# Altium PCB H202.PcbDoc (part 3 of 4)
Units mm, origin at the board's own origin, x right, y up, seen from the top; angles counter-clockwise.
Board outline 35.5 x 51.5 mm, 2 copper layers (Top Layer, Bottom Layer); 187 components, 179 nets, 669 pads, 25 vias.
Unrouted connection lines stored in the file: 414.
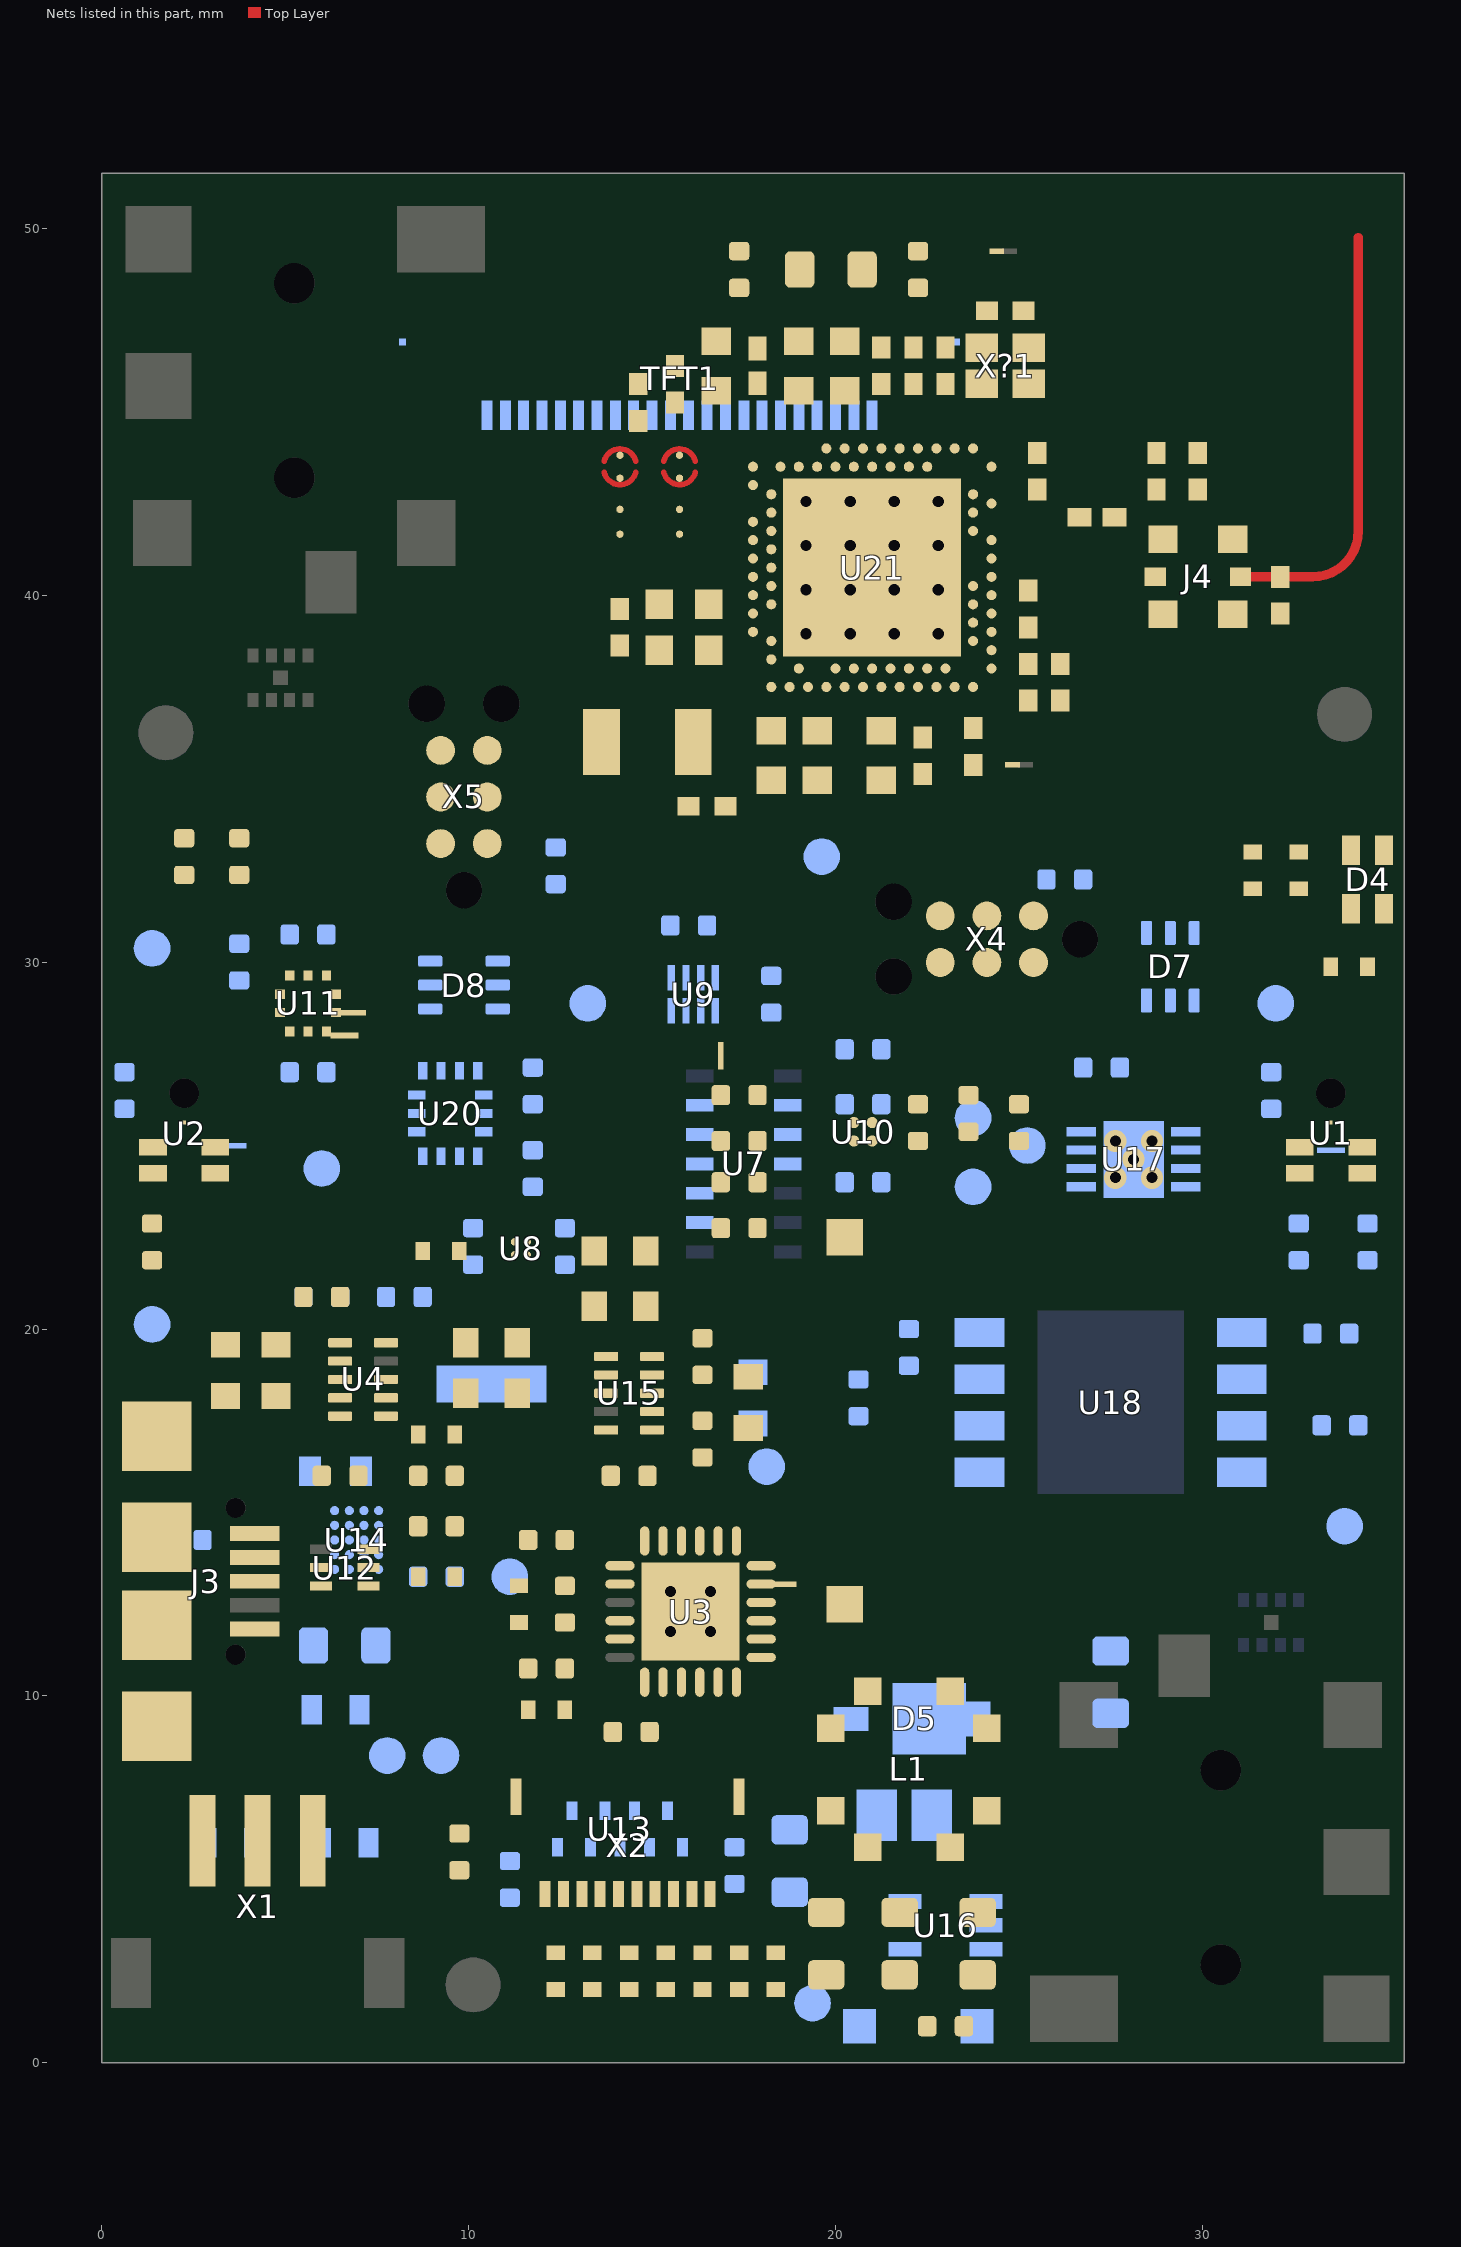
[diagram p2: the nets of this part, all layers, seen from the top]

## Part data (continued)
R5 R20: "910 kOhms ±1% 0.063W, 1/16W Chip Resistor 0402 (1005 Metric) Moisture Resistant Thick Film", Case Code (Imperial)=0402, Case Code (Metric)=1005, Manufacturer=Yageo, Manufacturer Part Number=RC0402FR-07910KL, Max Operating Temperature=155°C, Max Power Dissipation=63mW, Min Operating Temperature=-55°C, Power Rating=62.5mW, Resistance=910kR, Supplier Part Number 1=YAG3257CT-ND, Temperature Coefficient=100ppm/°C, Tolerance=1%, Voltage Rating=50V, Case/Package=0402, ComponentLink1Description=http://www.yageo.com/documents/recent/PYu-RC0402_51_RoHS_L_6.pdf?src-supplier=Avnet+Europe, ComponentLink1URL=http://www.yageo.com/documents/recent/PYu-RC0402_51_RoHS_L_6.pdf?src-supplier=Avnet+Europe, ComponentLink2Description=https://www.verical.com/server-webapp/html/getDatasheet?partID=741075&src-supplier=Verical, ComponentLink2URL=https://www.verical.com/server-webapp/html/getDatasheet?partID=741075&src-supplier=Verical, ComponentLink3Description=http://www.yageo.com/documents/recent/PYu-RC0402_51_RoHS_L_6.pdf?src-supplier=Avnet, ComponentLink3URL=http://www.yageo.com/documents/recent/PYu-RC0402_51_RoHS_L_6.pdf?src-supplier=Avnet, Composition="Thick Film", Contact Plating=Tin,Matte, Depth=0.5mm, Features="Moisture Resistant", Height=0.016inch, Lead Free="Lead Free", Length=1mm, Military Standard=Not, Number of Terminations=2, Packaging="Tape and Reel", Pricing 1="1=0.1, 10=0.015, 100=0.0062, 1000=0.0028, 2500=0.0024, 5000=0.002 (USD)", REACH SVHC=Unknown, Stock 1=96210, Supplier 1=Digi-Key, Termination=SMD/SMT, Voltage Rating (DC)=50V, Width=0.5mm
R6 R21: "390 kOhms ±1% 0.063W, 1/16W Chip Resistor 0402 (1005 Metric) Moisture Resistant Thick Film", Case Code (Imperial)=0402, Case Code (Metric)=1005, Manufacturer=Yageo, Manufacturer Part Number=RC0402FR-07390KL, Max Operating Temperature=155°C, Max Power Dissipation=63mW, Min Operating Temperature=-55°C, Power Rating=62.5mW, Resistance=390kR, Supplier Part Number 1=YAG3143CT-ND, Temperature Coefficient=100ppm/°C, Tolerance=1%, Voltage Rating=50V, Case/Package=0402, ComponentLink1Description=http://www.yageo.com/documents/recent/PYu-RC0402_51_RoHS_L_6.pdf?src-supplier=Future+Electronics, ComponentLink1URL=http://www.yageo.com/documents/recent/PYu-RC0402_51_RoHS_L_6.pdf?src-supplier=Future+Electronics, ComponentLink2Description=http://www.farnell.com/datasheets/2167052.pdf?src-supplier=Element14, ComponentLink2URL=http://www.farnell.com/datasheets/2167052.pdf?src-supplier=Element14, ComponentLink3Description=http://www.mouser.com/ds/2/447/PYu-RC0402_51_RoHS_L_6_r-8721.pdf?src-supplier=Mouser, ComponentLink3URL=http://www.mouser.com/ds/2/447/PYu-RC0402_51_RoHS_L_6_r-8721.pdf?src-supplier=Mouser, Composition="Thick Film", Depth=0.5mm, Features="Moisture Resistant", Height=0.016inch, Lead Free="Lead Free", Length=1mm, Military Standard=Not, Number of Terminations=2, Packaging="Tape and Reel", Pricing 1="1=0.1, 10=0.016, 100=0.0064, 1000=0.0029, 2500=0.0025, 5000=0.0021 (USD)", REACH SVHC=Unknown, Stock 1=118017, Supplier 1=Digi-Key, Termination=SMD/SMT, Weight=2.3E-05oz, Width=0.02inch
R7 R22: "88.7 kOhms ±1% 0.063W, 1/16W Chip Resistor 0402 (1005 Metric) Moisture Resistant Thick Film", Case Code (Imperial)=0402, Case Code (Metric)=1005, Manufacturer=Yageo, Manufacturer Part Number=RC0402FR-0788K7L, Max Operating Temperature=155°C, Min Operating Temperature=-55°C, Power Rating=62.5mW, Resistance=88.7kR, Supplier Part Number 1=311-88.7KLRCT-ND, Temperature Coefficient=100ppm/°C, Tolerance=1%, Voltage Rating=50V, Case/Package=0402, ComponentLink1Description=http://www.yageo.com/documents/recent/PYu-RC0402_51_RoHS_L_6.pdf?src-supplier=Avnet+Europe, ComponentLink1URL=http://www.yageo.com/documents/recent/PYu-RC0402_51_RoHS_L_6.pdf?src-supplier=Avnet+Europe, ComponentLink2Description=http://www.yageo.com/documents/recent/PYu-RC0402_51_RoHS_L_6_r.pdf?src-supplier=Future+Electronics, ComponentLink2URL=http://www.yageo.com/documents/recent/PYu-RC0402_51_RoHS_L_6_r.pdf?src-supplier=Future+Electronics, ComponentLink3Description=http://www.yageo.com/documents/recent/PYu-RC0402_51_RoHS_L_6.pdf?src-supplier=Avnet, ComponentLink3URL=http://www.yageo.com/documents/recent/PYu-RC0402_51_RoHS_L_6.pdf?src-supplier=Avnet, Composition="Thick Film", Contact Plating=Tin,Matte, Depth=0.5mm, Height=0.35mm, Lead Free="Lead Free", Length=1mm, Military Standard=Not, Packaging="Tape and Reel", Pricing 1="1=0.1, 10=0.016, 100=0.0064, 1000=0.0029, 2500=0.0025, 5000=0.0021 (USD)", Stock 1=136150, Supplier 1=Digi-Key, Termination=SMD/SMT, Voltage Rating (DC)=50V, Width=0.5mm
R8 R9 R17: "2.7 kOhms ±1% 0.063W, 1/16W Chip Resistor 0402 (1005 Metric) Moisture Resistant Thick Film", Case Code (Imperial)=0402, Case Code (Metric)=1005, Manufacturer=Yageo, Manufacturer Part Number=RC0402FR-072K7L, Max Operating Temperature=155°C, Max Power Dissipation=63mW, Min Operating Temperature=-55°C, Package Quantity=1, Resistance=2.7kR, Supplier Part Number 1=311-2.70KLRCT-ND, Temperature Coefficient=100ppm/°C, Tolerance=1%, Voltage Rating=50V, Case/Package=0402, ComponentLink1Description=http://www.mouser.com/ds/2/447/PYu-RC0402_51_RoHS_L_6_r-8721.pdf?src-supplier=Mouser, ComponentLink1URL=http://www.mouser.com/ds/2/447/PYu-RC0402_51_RoHS_L_6_r-8721.pdf?src-supplier=Mouser, ComponentLink2Description=http://www.yageo.com/documents/recent/PYu-RC_Group_51_RoHS_L_9.pdf?src-supplier=Digi-Key, ComponentLink2URL=http://www.yageo.com/documents/recent/PYu-RC_Group_51_RoHS_L_9.pdf?src-supplier=Digi-Key, ComponentLink3Description=http://www.yageo.com/documents/recent/PYu-RC_Group_51_RoHS_L_10.pdf?src-supplier=Digi-Key, ComponentLink3URL=http://www.yageo.com/documents/recent/PYu-RC_Group_51_RoHS_L_10.pdf?src-supplier=Digi-Key, ComponentLink4Description=http://www.farnell.com/datasheets/2167052.pdf?src-supplier=Element14, ComponentLink4URL=http://www.farnell.com/datasheets/2167052.pdf?src-supplier=Element14, Composition="Thick Film", Depth=0.5mm, Features="Moisture Resistant", Height=0.016inch, Lead Free="Lead Free", Length=1mm, Military Standard=Not, Number of Terminations=2, Packaging="Tape and Reel", Power Rating=63mW, Pricing 1="1=0.1, 10=0.016, 100=0.0064, 1000=0.0029, 2500=0.0025, 5000=0.0021 (USD)", REACH SVHC=Unknown, Stock 1=261850, Supplier 1=Digi-Key, Termination=SMD/SMT, Width=0.02inch, Working Voltage=50V
  R8 R9: ClassName=U_ESP32-WROOM32D_Module
R10 R11 R29 R30 R31: "10 kOhms ±1% 0.063W, 1/16W Chip Resistor 0402 (1005 Metric) Moisture Resistant Thick Film", Case Code (Imperial)=0402, Case Code (Metric)=1005, Manufacturer=Yageo, Manufacturer Part Number=RC0402FR-0710KP, Max Operating Temperature=155°C, Max Power Dissipation=63mW, Min Operating Temperature=-55°C, Resistance=10kR, Supplier Part Number 1=YAG1249CT-ND, Temperature Coefficient=150ppm/°C, Tolerance=1%, Case/Package=0402, ComponentLink1Description=http://www.yageo.com/NewPortal/yageodocoutput?fileName=/pdf/R-Chip/PYu-RC_51_RoHS_P_0.pdf&src-supplier=Digi-Key, ComponentLink1URL=http://www.yageo.com/NewPortal/yageodocoutput?fileName=/pdf/R-Chip/PYu-RC_51_RoHS_P_0.pdf&src-supplier=Digi-Key, Composition="Thick Film", Features="Moisture Resistant", Height=0.016inch, Length=0.039inch, Number of Terminations=2, Packaging="Tape and Reel", Pricing 1="1=0.1, 10=0.035, 100=0.014, 1000=0.0063, 2500=0.0055, 5000=0.0045 (USD)", Stock 1=839368, Supplier 1=Digi-Key, Width=0.02inch
  R10 R29 R30 R31: Mount="Surface Mount"
R12: "18.2 kOhms ±1% 0.063W, 1/16W Chip Resistor 0402 (1005 Metric) Moisture Resistant Thick Film", Case Code (Imperial)=0402, Case Code (Metric)=1005, Manufacturer=Yageo, Manufacturer Part Number=RC0402FR-0718K2L, Max Operating Temperature=155°C, Max Power Dissipation=63mW, Min Operating Temperature=-55°C, Package Quantity=10000, Power Rating=62.5mW, Resistance=18.2kR, Supplier Part Number 1=YAG2371CT-ND, Temperature Coefficient=100ppm/°C, Tolerance=1%, Voltage Rating=50V, Case/Package=0402, ComponentLink1Description=http://www.yageo.com/documents/recent/PYu-RC0402_51_RoHS_L_6_r.pdf?src-supplier=Future+Electronics, ComponentLink1URL=http://www.yageo.com/documents/recent/PYu-RC0402_51_RoHS_L_6_r.pdf?src-supplier=Future+Electronics, ComponentLink2Description=http://www.yageo.com.tw/exep/pages/download/literatures/PYu-R_INT-thick_7.pdf?src-supplier=Digi-Key, ComponentLink2URL=http://www.yageo.com.tw/exep/pages/download/literatures/PYu-R_INT-thick_7.pdf?src-supplier=Digi-Key, ComponentLink3Description=http://www.mouser.com/ds/2/447/PYu-RC0402_51_RoHS_L_6_r-8721.pdf?src-supplier=Mouser, ComponentLink3URL=http://www.mouser.com/ds/2/447/PYu-RC0402_51_RoHS_L_6_r-8721.pdf?src-supplier=Mouser, ComponentLink4Description=http://www.yageo.com/documents/recent/PYu-RC0402_51_RoHS_L_6.pdf?src-supplier=Avnet+Europe, ComponentLink4URL=http://www.yageo.com/documents/recent/PYu-RC0402_51_RoHS_L_6.pdf?src-supplier=Avnet+Europe, Composition="Thick Film", Contact Plating=Tin,Lead,Matte, Depth=0.5mm, Features="Moisture Resistant", Height=0.016inch, Lead Free="Lead Free", Length=1mm, Military Standard=Not, Number of Terminations=2, Packaging="Tape and Reel", Pricing 1="1=0.1, 10=0.015, 100=0.0062, 1000=0.0028, 2500=0.0024, 5000=0.002 (USD)", Radiation Hardening=No, Stock 1=372233, Supplier 1=Digi-Key, Termination=SMD/SMT, Voltage Rating (DC)=50V, Width=0.02inch, Working Voltage=50V
R13: "11 kOhms ±1% 0.063W, 1/16W Chip Resistor 0402 (1005 Metric) Moisture Resistant Thick Film", Case Code (Imperial)=0402, Case Code (Metric)=1005, Manufacturer=Yageo, Manufacturer Part Number=RC0402FR-0711KL, Max Operating Temperature=155°C, Max Power Dissipation=63mW, Min Operating Temperature=-55°C, Package Quantity=1, Resistance=11kR, Supplier Part Number 1=311-11.0KLRCT-ND, Temperature Coefficient=100ppm/°C, Tolerance=1%, Voltage Rating=50V, Case/Package=0402, ComponentLink1Description=http://www.yageo.com/documents/recent/PYu-RC_Group_51_RoHS_L_10.pdf?src-supplier=Digi-Key, ComponentLink1URL=http://www.yageo.com/documents/recent/PYu-RC_Group_51_RoHS_L_10.pdf?src-supplier=Digi-Key, ComponentLink2Description=http://www.yageo.com/documents/recent/PYu-RC_Group_51_RoHS_L_9.pdf?src-supplier=Digi-Key, ComponentLink2URL=http://www.yageo.com/documents/recent/PYu-RC_Group_51_RoHS_L_9.pdf?src-supplier=Digi-Key, ComponentLink3Description=http://www.mouser.com/ds/2/447/PYu-RC0402_51_RoHS_L_6_r-8721.pdf?src-supplier=Mouser, ComponentLink3URL=http://www.mouser.com/ds/2/447/PYu-RC0402_51_RoHS_L_6_r-8721.pdf?src-supplier=Mouser, ComponentLink4Description=http://www.farnell.com/datasheets/1018594.pdf?src-supplier=Farnell, ComponentLink4URL=http://www.farnell.com/datasheets/1018594.pdf?src-supplier=Farnell, Composition="Thick Film", Depth=0.5mm, Features="Moisture Resistant", Height=0.016inch, Lead Free="Lead Free", Length=0.039inch, Military Standard=Not, Number of Pins=2, Number of Terminations=2, Packaging="Tape and Reel", Power Rating=63mW, Pricing 1="1=0.1, 10=0.015, 100=0.0062, 1000=0.0028, 2500=0.0024, 5000=0.002 (USD)", REACH SVHC="No SVHC", Stock 1=632376, Supplier 1=Digi-Key, Termination=SMD/SMT, Voltage Rating (DC)=50V, Width=0.02inch
R14: "7.5 kOhms ±1% 0.1W, 1/10W Chip Resistor 0603 (1608 Metric) Moisture Resistant Thick Film", Case Code (Imperial)=0603, Case Code (Metric)=1608, Manufacturer=Yageo, Manufacturer Part Number=RC0603FR-077K5L, Max Operating Temperature=155°C, Max Power Dissipation=100mW, Min Operating Temperature=-55°C, Package Quantity=1, Resistance="7.5 kOhm", Supplier Part Number 1=311-7.50KHRCT-ND, Temperature Coefficient=100ppm/°C, Tolerance=1%, Voltage Rating=50V, Working Voltage=75V, Case/Package=0603, ComponentLink1Description=http://www.yageo.com/documents/recent/PYu-RC_Group_51_RoHS_L_10.pdf?src-supplier=Digi-Key, ComponentLink1URL=http://www.yageo.com/documents/recent/PYu-RC_Group_51_RoHS_L_10.pdf?src-supplier=Digi-Key, ComponentLink2Description=http://www.mouser.com/catalog/specsheets/RC0603.pdf?src-supplier=Mouser, ComponentLink2URL=http://www.mouser.com/catalog/specsheets/RC0603.pdf?src-supplier=Mouser, ComponentLink3Description=http://www.farnell.com/datasheets/443971.pdf?src-supplier=Element14, ComponentLink3URL=http://www.farnell.com/datasheets/443971.pdf?src-supplier=Element14, ComponentLink4Description=https://www.verical.com/server-webapp/html/getDatasheet?partID=326523&src-supplier=Verical, ComponentLink4URL=https://www.verical.com/server-webapp/html/getDatasheet?partID=326523&src-supplier=Verical, Composition="Thick Film", Depth=0.8mm, Features="Moisture Resistant", Height=0.45mm, Lead Free="Lead Free", Length=1.6mm, Military Standard=Not, Number of Pins=2, Number of Terminations=2, Packaging="Tape and Reel", Power Rating=100mW, Pricing 1="1=0.1, 10=0.023, 100=0.0094, 1000=0.0042, 2500=0.0037 (USD)", REACH SVHC="No SVHC", Stock 1=1778854, Supplier 1=Digi-Key, Termination=SMD/SMT, Voltage Rating (DC)=50V, Width=0.031inch
R15: "5.36 kOhms ±1% 0.063W, 1/16W Chip Resistor 0402 (1005 Metric) Moisture Resistant Thick Film", Case Code (Imperial)=0402, Case Code (Metric)=1005, Manufacturer=Yageo, Manufacturer Part Number=RC0402FR-075K36L, Max Operating Temperature=155°C, Max Power Dissipation=63mW, Min Operating Temperature=-55°C, Package Quantity=1, Power Rating=62.5mW, Resistance=5.36kR, Supplier Part Number 1=311-5.36KLRCT-ND, Temperature Coefficient=100ppm/°C, Tolerance=1%, Voltage Rating=50V, Case/Package=0402, ComponentLink1Description=https://www.verical.com/server-webapp/html/getDatasheet?partID=314179&src-supplier=Verical, ComponentLink1URL=https://www.verical.com/server-webapp/html/getDatasheet?partID=314179&src-supplier=Verical, ComponentLink2Description=http://www.yageo.com/pdf/PYu-RC0402_51_RoHS_L_4.pdf?src-supplier=Avnet, ComponentLink2URL=http://www.yageo.com/pdf/PYu-RC0402_51_RoHS_L_4.pdf?src-supplier=Avnet, ComponentLink3Description=http://www.yageo.com/documents/recent/PYu-RC_Group_51_RoHS_L_10.pdf?src-supplier=Digi-Key, ComponentLink3URL=http://www.yageo.com/documents/recent/PYu-RC_Group_51_RoHS_L_10.pdf?src-supplier=Digi-Key, ComponentLink4Description=http://www.yageo.com/documents/recent/PYu-RC0402_51_RoHS_L_6_r.pdf?src-supplier=Mouser, ComponentLink4URL=http://www.yageo.com/documents/recent/PYu-RC0402_51_RoHS_L_6_r.pdf?src-supplier=Mouser, ComponentLink5Description=http://www.yageo.com/documents/recent/PYu-RC0402_51_RoHS_L_6.pdf?src-supplier=Avnet+Europe, ComponentLink5URL=http://www.yageo.com/documents/recent/PYu-RC0402_51_RoHS_L_6.pdf?src-supplier=Avnet+Europe, Composition="Thick Film", Contact Plating=Tin,Lead,Matte, Depth=0.5mm, Features="Moisture Resistant", Height=0.016inch, Lead Free="Lead Free", Length=1mm, Military Standard=Not, Number of Terminations=2, Packaging="Tape and Reel", Pricing 1="1=0.1, 10=0.016, 100=0.0064, 1000=0.0029, 2500=0.0025, 5000=0.0021 (USD)", Radiation Hardening=No, Stock 1=170749, Supplier 1=Digi-Key, Termination=SMD/SMT, Voltage Rating (DC)=50V, Width=0.02inch
R16: library part "RES SMD 2.7K OHM 1% 1/16W 0402", "2.7 kOhms ±1% 0.063W, 1/16W Chip Resistor 0402 (1005 Metric) Moisture Resistant Thick Film", Case Code (Imperial)=0402, Case Code (Metric)=1005, Manufacturer=Yageo, Max Operating Temperature=155°C, Max Power Dissipation=63mW, Min Operating Temperature=-55°C, Package Quantity=1, Resistance=2.7kR, Supplier Part Number 1=311-2.70KLRCT-ND, Temperature Coefficient=100ppm/°C, Tolerance=1%, Voltage Rating=50V, Case/Package=0402, ComponentLink1Description=http://www.mouser.com/ds/2/447/PYu-RC0402_51_RoHS_L_6_r-8721.pdf?src-supplier=Mouser, ComponentLink1URL=http://www.mouser.com/ds/2/447/PYu-RC0402_51_RoHS_L_6_r-8721.pdf?src-supplier=Mouser, ComponentLink2Description=http://www.yageo.com/documents/recent/PYu-RC_Group_51_RoHS_L_9.pdf?src-supplier=Digi-Key, ComponentLink2URL=http://www.yageo.com/documents/recent/PYu-RC_Group_51_RoHS_L_9.pdf?src-supplier=Digi-Key, ComponentLink3Description=http://www.yageo.com/documents/recent/PYu-RC_Group_51_RoHS_L_10.pdf?src-supplier=Digi-Key, ComponentLink3URL=http://www.yageo.com/documents/recent/PYu-RC_Group_51_RoHS_L_10.pdf?src-supplier=Digi-Key, ComponentLink4Description=http://www.farnell.com/datasheets/2167052.pdf?src-supplier=Element14, ComponentLink4URL=http://www.farnell.com/datasheets/2167052.pdf?src-supplier=Element14, Composition="Thick Film", Depth=0.5mm, Features="Moisture Resistant", Height=0.016inch, Lead Free="Lead Free", Length=1mm, Manufacturer Part Number=RC0402FR-072K7L, Military Standard=Not, Number of Terminations=2, Packaging="Tape and Reel", Power Rating=63mW, Pricing 1="1=0.1, 10=0.016, 100=0.0064, 1000=0.0029, 2500=0.0025, 5000=0.0021 (USD)", REACH SVHC=Unknown, Stock 1=261850, Supplier 1=Digi-Key, Termination=SMD/SMT, Width=0.02inch, Working Voltage=50V
R18 R28: "1 kOhms ±1% 0.063W, 1/16W Chip Resistor 0402 (1005 Metric) Moisture Resistant Thick Film", Case Code (Imperial)=0402, Case Code (Metric)=1005, Manufacturer=Yageo, Manufacturer Part Number=RC0402FR-071KL, Max Operating Temperature=155°C, Min Operating Temperature=-55°C, Power Rating=62.5mW, Resistance=1kR, Supplier Part Number 1=311-1.00KLRCT-ND, Temperature Coefficient=100ppm/°C, Tolerance=1%, Voltage Rating=50V, Case/Package=0402, ComponentLink1Description=http://www.mouser.com/ds/2/447/PYu-RC0402_51_RoHS_L_6_r-8721.pdf?src-supplier=Mouser, ComponentLink1URL=http://www.mouser.com/ds/2/447/PYu-RC0402_51_RoHS_L_6_r-8721.pdf?src-supplier=Mouser, ComponentLink2Description=http://documents.rs-components.com/techlib://itc_doclist_GB.htm?stockno=6186122&src-supplier=RSComponents, ComponentLink2URL=http://documents.rs-components.com/techlib://itc_doclist_GB.htm?stockno=6186122&src-supplier=RSComponents, ComponentLink3Description=http://www.farnell.com/datasheets/1018594.pdf?src-supplier=Element14, ComponentLink3URL=http://www.farnell.com/datasheets/1018594.pdf?src-supplier=Element14, ComponentLink4Description=http://www.yageo.com/documents/recent/PYu-RC0402_51_RoHS_L_6_r.pdf?src-supplier=Future+Electronics, ComponentLink4URL=http://www.yageo.com/documents/recent/PYu-RC0402_51_RoHS_L_6_r.pdf?src-supplier=Future+Electronics, ComponentLink5Description=http://www.farnell.com/datasheets/2167052.pdf?src-supplier=Element14, ComponentLink5URL=http://www.farnell.com/datasheets/2167052.pdf?src-supplier=Element14, Composition="Thick Film", Depth=0.5mm, Height=0.32mm, Lead Free="Lead Free", Length=1mm, Military Standard=Not, Number of Pins=2, Packaging="Tape and Reel", Pricing 1="1=0.1, 10=0.015, 100=0.0062, 1000=0.0028, 2500=0.0024, 5000=0.002 (USD)", REACH SVHC=Unknown, Stock 1=9574509, Supplier 1=Digi-Key, Termination=SMD/SMT, Voltage Rating (DC)=50V, Width=0.5mm
  R28: Mount="Surface Mount"
R19: "5.1 kOhms ±1% 0.063W, 1/16W Chip Resistor 0402 (1005 Metric) Moisture Resistant Thick Film", Case Code (Imperial)=0402, Case Code (Metric)=1005, Manufacturer=Yageo, Manufacturer Part Number=RC0402FR-075K1L, Max Operating Temperature=155°C, Max Power Dissipation=63mW, Min Operating Temperature=-55°C, Package Quantity=1, Resistance=5.1kR, Supplier Part Number 1=311-5.10KLRCT-ND, Temperature Coefficient=100ppm/°C, Tolerance=1%, Voltage Rating=50V, Case/Package=0402, ComponentLink1Description=https://www.verical.com/server-webapp/html/getDatasheet?partID=323636&src-supplier=Verical, ComponentLink1URL=https://www.verical.com/server-webapp/html/getDatasheet?partID=323636&src-supplier=Verical, ComponentLink2Description=http://www.yageo.com/documents/recent/PYu-RC_Group_51_RoHS_L_10.pdf?src-supplier=Digi-Key, ComponentLink2URL=http://www.yageo.com/documents/recent/PYu-RC_Group_51_RoHS_L_10.pdf?src-supplier=Digi-Key, ComponentLink3Description=http://www.farnell.com/datasheets/2167052.pdf?src-supplier=Element14, ComponentLink3URL=http://www.farnell.com/datasheets/2167052.pdf?src-supplier=Element14, ComponentLink4Description=http://www.yageo.com/documents/recent/PYu-RC0402_51_RoHS_L_6_r.pdf?src-supplier=Future+Electronics, ComponentLink4URL=http://www.yageo.com/documents/recent/PYu-RC0402_51_RoHS_L_6_r.pdf?src-supplier=Future+Electronics, ComponentLink5Description=http://www.yageo.com/documents/recent/PYu-RC0402_51_RoHS_L_6_r.pdf?src-supplier=Mouser, ComponentLink5URL=http://www.yageo.com/documents/recent/PYu-RC0402_51_RoHS_L_6_r.pdf?src-supplier=Mouser, ComponentLink6Description=http://www.farnell.com/datasheets/1018594.pdf?src-supplier=Element14, ComponentLink6URL=http://www.farnell.com/datasheets/1018594.pdf?src-supplier=Element14, Composition="Thick Film", Depth=0.5mm, Features="Moisture Resistant", Height=0.016inch, Lead Free="Lead Free", Length=1mm, Military Standard=Not, Number of Terminations=2, Packaging="Tape and Reel", Power Rating=63mW, Pricing 1="1=0.1, 10=0.016, 100=0.0064, 1000=0.0029, 2500=0.0025, 5000=0.0021 (USD)", REACH SVHC=Unknown, Stock 1=19803, Supplier 1=Digi-Key, Termination=SMD/SMT, Voltage Rating (DC)=50V, Width=0.02inch, Working Voltage=50V
R23 R24 R25: "402 Ohms ±1% 0.063W, 1/16W Chip Resistor 0402 (1005 Metric) Moisture Resistant Thick Film", Case Code (Imperial)=0402, Case Code (Metric)=1005, Manufacturer=Yageo, Manufacturer Part Number=RC0402FR-07402RL, Max Operating Temperature=155°C, Max Power Dissipation=63mW, Min Operating Temperature=-55°C, Power Rating=62.5mW, Resistance=402R, Supplier Part Number 1=YAG3152CT-ND, Temperature Coefficient=100ppm/°C, Tolerance=1%, Voltage Rating=50V, Case/Package=0402, ComponentLink1Description=http://www.yageo.com/documents/recent/PYu-RC0402_51_RoHS_L_6.pdf?src-supplier=Avnet, ComponentLink1URL=http://www.yageo.com/documents/recent/PYu-RC0402_51_RoHS_L_6.pdf?src-supplier=Avnet, ComponentLink2Description=http://www.yageo.com/documents/recent/PYu-RC0402_51_RoHS_L_6.pdf?src-supplier=Avnet+Europe, ComponentLink2URL=http://www.yageo.com/documents/recent/PYu-RC0402_51_RoHS_L_6.pdf?src-supplier=Avnet+Europe, ComponentLink3Description=http://www.mouser.com/ds/2/447/PYu-RC0402_51_RoHS_L_6_r-8721.pdf?src-supplier=Mouser, ComponentLink3URL=http://www.mouser.com/ds/2/447/PYu-RC0402_51_RoHS_L_6_r-8721.pdf?src-supplier=Mouser, Composition="Thick Film", Contact Plating=Tin,Matte, Depth=0.5mm, Features="Moisture Resistant", Height=0.016inch, Lead Free="Lead Free", Length=0.039inch, Military Standard=Not, Mount="Surface Mount", Number of Terminations=2, Packaging="Tape and Reel", Pricing 1="1=0.1, 10=0.016, 100=0.0064, 1000=0.0029, 2500=0.0025, 5000=0.0021 (USD)", Stock 1=0, Supplier 1=Digi-Key, Termination=SMD/SMT, Width=0.02inch
R26: "2.26 Ohms ±1% 0.1W, 1/10W Chip Resistor 0603 (1608 Metric) Automotive AEC-Q200 Thick Film", Case Code (Imperial)=0603, Case Code (Metric)=1608, Manufacturer="Vishay Dale", Manufacturer Part Number=CRCW06032R26FKEA, Max Operating Temperature=155°C, Max Power Dissipation=100mW, Min Operating Temperature=-55°C, Package Quantity=5000, Resistance=2.26R, Supplier Part Number 1=541-2.26HHCT-ND, Temperature Coefficient=100ppm/°C, Tolerance=1%, Voltage Rating=75V, Case/Package=0603, ComponentLink1Description=http://www.vishay.com/docs/20035/dcrcwe3.pdf?src-supplier=Avnet, ComponentLink1URL=http://www.vishay.com/docs/20035/dcrcwe3.pdf?src-supplier=Avnet, Composition="Thick Film", Contact Plating=Tin, Depth=0.85mm, Features="Automotive AEC-Q200", Height=0.02inch, Lead Free="Lead Free", Length=1.55mm, Military Standard=Not, Mount="Surface Mount", Number of Terminations=2, Packaging="Tape and Reel", Power Rating=100mW, Pricing 1="1=0.1, 10=0.04, 100=0.0164, 1000=0.0074, 2500=0.0064 (USD)", Radiation Hardening=No, Stock 1=18141, Supplier 1=Digi-Key, Termination=SMD/SMT, Weight=7.1E-05oz, Width=0.85mm
R32 R33: library part "RES SMD NO BOM 0402", "Placeholder for a 0402 resistor", Case/Package=0402
SB1 SB2: Part number IPS=N.A., Artikkelnr Noca=N.A., ComponentLink1Description=Datasheet, ComponentLink2Description="Supplier link", Footprint Doc=Solderbridge, LatestRevisionDate=2009-12-14, Part Number=Solderbridge, Pin Count=2, Published=2009-12-14, Publisher="Nordic Semiconductor"
SB3 SB4: library part "Solderbridge Shorted", "Shorted Solderbridge", Part number IPS=N.A., Artikkelnr Noca=N.A., ComponentLink1Description=Datasheet, ComponentLink2Description="Supplier link", Footprint Doc=Solderbridge_Shorted, LatestRevisionDate=2012-08-07, Part Number="Solderbridge Shorted", Pin Count=2, Published=2012-08-07, Publisher="Nordic Semiconductor"
TFT1: library part "CONN 0524352271 FFC TOP 22POS 0.50MM R/A", "22 Position FFC, FPC Connector Contacts, Top 0.020\" (0.50mm) Surface Mount, Right Angle", Current Rating=500mA, Flammability Rating="UL94 V-0", Manufacturer=Molex, Manufacturer Part Number=0524352271, Max Operating Temperature=85°C, Max Voltage Rating (AC)=50V, Min Operating Temperature=-40°C, Package Quantity=1, Supplier Part Number 1=WM6753CT-ND, Actuator Material=Polyphenylene, ComponentLink1Description=https://www.verical.com/server-webapp/html/getDatasheet?partID=448906&src-supplier=Verical, ComponentLink1URL=https://www.verical.com/server-webapp/html/getDatasheet?partID=448906&src-supplier=Verical, ComponentLink2Description=http://components.arrow.com/part/dataview/0323_03515907?src-supplier=Arrow+Europe, ComponentLink2URL=http://components.arrow.com/part/dataview/0323_03515907?src-supplier=Arrow+Europe, Contact Material=Bronze, Contact Plating=Gold, Depth=4.7mm, Housing Material=Nylon, Length=17.6mm, Max Voltage Rating (DC)=50V, Mount="Surface Mount", Number of Positions=22, Number of Rows=1, Orientation="Right Angle", Packaging="Tape and Reel", pin_1=LED_A, pin_2=LED_K, pin_3=IM2, pin_4=IM1, pin_5=IM0, pin_6=VDD, pin_7=DB7, pin_8=DB6, pin_9=DB5, pin_10=DB4, pin_11=DB3, pin_12=DB2, pin_13=DB1, pin_14=DB0, pin_15=RD, pin_16=WR, pin_17=RS, pin_18=CS, pin_19=TE, pin_20=RESET, pin_21=SDA, pin_22=GND, pin_23=MNT, pin_24=MNT, Pitch=0.5mm, Pricing 1="1=2.18, 10=1.978, 25=1.8564, 50=1.7758, 100=1.6951, 250=1.5337, 500=1.4126 (USD)", Radiation Hardening=No, Stock 1=4239, Supplier 1=Digi-Key, Termination=Solder, Voltage Rating=50V, Wire/Cable Type=Straight
TP1 TP2 TP3 TP4 TP5 TP6 TP7 TP8 TP9 TP10 TP11 TP12 TP13 TP14 TP15: "Test Point. There is nothing to buy or mount.", Manufacturer=N/A, ClassName=TestPoint, CompType=TestPoint, MountType=N/A, PackageReference=TetsPoint, PartNumber=N/A
U1 U2: library part "IC IM69D130 MICROPHONE MEMS DIGITAL PDM OMNI", "20Hz ~ 20kHz Digital, PDM Microphone MEMS (Silicon) 1.62V ~ 3.6V Omnidirectional (-36dB ±1dB @ 94dB SPL) Solder Pads", Manufacturer=Infineon, Max Frequency=3.3MHz, Operating Supply Current=1.3mA, Operating Supply Voltage=-3.6V, Supplier Part Number 1=IM69D130V01XTSA1CT-ND, ComponentLink1Description=http://www.farnell.com/datasheets/2718732.pdf?src-supplier=Newark, ComponentLink1URL=http://www.farnell.com/datasheets/2718732.pdf?src-supplier=Newark, ComponentLink2Description=https://www.infineon.com/dgdl/Infineon-IM69D130-DS-v01_00-EN.pdf?fileId=5546d462602a9dc801607a0e46511a2e&src-supplier=Digi-Key, ComponentLink2URL=https://www.infineon.com/dgdl/Infineon-IM69D130-DS-v01_00-EN.pdf?fileId=5546d462602a9dc801607a0e46511a2e&src-supplier=Digi-Key, ComponentLink3Description=http://www.farnell.com/datasheets/2718732.pdf?src-supplier=Farnell, ComponentLink3URL=http://www.farnell.com/datasheets/2718732.pdf?src-supplier=Farnell, Direction=Omnidirectional, Halogen Free="Halogen Free", Lead Free="Lead Free", Manufacturer Part Number=IM69D130V01XTSA1, Output Type=Digital, Packaging="Cut Tape", Pricing 1="1=1.76, 10=1.458, 25=1.3476, 50=1.2674, 100=1.19, 500=1.0214 (USD)", RoHS Compliant=Yes, Shape=Rectangular, Stock 1=16861, Supplier 1=Digi-Key, Termination=Solder
U3: library part "IC CMX655DQ6-TR1K VOICE CODEC 16BIT 24VQFN", "Voice-Band Interface 16 b I²S, PCM, SPI 24-VQFN (4x4)", Case/Package=VQFN, Manufacturer="CML Microcircuits", Supplier Part Number 1=226-CMX655DQ6, ComponentLink1Description=https://www.cmlmicro.com/wp-content/uploads/2018/10/CMX655_ds.pdf?src-supplier=Digi-Key, ComponentLink1URL=https://www.cmlmicro.com/wp-content/uploads/2018/10/CMX655_ds.pdf?src-supplier=Digi-Key, Manufacturer Part Number=CMX655DQ6, Mount="Surface Mount", Packaging="Cut Tape", Pricing 1="1=1.41, 10=1.41, 50=1.36, 100=1.22, 1000=1.07, 10000=1.01 (USD)", Stock 1=164, Supplier 1=Mouser, Supplier 2=Digi-Key, Supplier Part Number 2=2032-1036-1-ND
U4 U15: library part "IC TPSM82822SIL 5.5-V INPUT, 2-A STEP-DOWN MODUL", "Non-Isolated PoL Module DC DC Converter 1 Output 0.6 ~ 4V    2A 2.4V - 5.5V Input", Manufacturer="Texas Instruments", Supplier Part Number 1=296-TPSM82822SILRCT-ND, ComponentLink1Description=https://octopart.com/click/track?ai=10049&ct=datasheets&sig=01db677&at=physicalpart&sid=370&ppid=108054084&hlid=30259078&src-supplier=TI+store, ComponentLink1URL=https://octopart.com/click/track?ai=10049&ct=datasheets&sig=01db677&at=physicalpart&sid=370&ppid=108054084&hlid=30259078&src-supplier=TI+store, Manufacturer Part Number=TPSM82822SILR, Pricing 1="1=2.81, 10=2.523, 25=2.3848, 100=1.961, 250=1.7596, 500=1.696, 1000=1.4098 (USD)", Stock 1=2595, Supplier 1=Digi-Key
U5 U6: library part "FILTER RC(PI) ESD SMD  8-UFDFN EP", "RC (Pi) EMI Filter 2nd Order Low Pass 3 Channel R = 47Ohms, 100Ohms, C = 20pF  8-UFDFN Exposed Pad", Capacitance=20pF, Case/Package=SMD/SMT, Clamping Voltage=10V, Frequency=308MHz, Manufacturer="Texas Instruments", Max Operating Temperature=85°C, Min Operating Temperature=-40°C, Operating Supply Voltage=5.5V, Package Quantity=1, Supplier Part Number 1=296-28299-1-ND, ComponentLink1Description=http://www.ti.com/lit/ds/symlink/tpd3f303.pdf?src-supplier=Digi-Key, ComponentLink1URL=http://www.ti.com/lit/ds/symlink/tpd3f303.pdf?src-supplier=Digi-Key, ComponentLink2Description=http://focus.ti.com/lit/ds/symlink/tpd3f303.pdf?src-supplier=Avnet+Europe, ComponentLink2URL=http://focus.ti.com/lit/ds/symlink/tpd3f303.pdf?src-supplier=Avnet+Europe, ComponentLink3Description=https://www.verical.com/server-webapp/html/getDatasheet?partID=302817&src-supplier=Verical, ComponentLink3URL=https://www.verical.com/server-webapp/html/getDatasheet?partID=302817&src-supplier=Verical, ComponentLink4Description=http://www.farnell.com/datasheets/1558442.pdf?src-supplier=Element14, ComponentLink4URL=http://www.farnell.com/datasheets/1558442.pdf?src-supplier=Element14, Contact Plating=Gold, Depth=1.7mm, ESD Protection=Yes, Height=0.026inch, Lead Free="Lead Free", Length=2.2mm, Manufacturer Part Number=TPD3F303DPVR, Mount="Surface Mount", Number of Channels=3, Number of Pins=8, Packaging="Tape and Reel", Pricing 1="1=0.85, 10=0.812, 25=0.7856, 50=0.6414, 100=0.576, 250=0.5236, 500=0.4974, 1000=0.4451 (USD)", Radiation Hardening=No, REACH SVHC="No SVHC", Stock 1=4896, Supplier 1=Digi-Key, Termination=Flat, Width=0.063inch
U7: library part "IC MAX30102EFD+T INTEGRATED OPTICAL SENSOR", "Oximeter/Heart Rate Sensor IÂ²C Output", Manufacturer=Maxim, Max Operating Temperature=85°C, Min Operating Temperature=-40°C, Supplier Part Number 1=MAX30102EFD+TCT-ND, ComponentLink1Description=https://datasheets.maximintegrated.com/en/ds/MAX30102.pdf?src-supplier=Digi-Key, ComponentLink1URL=https://datasheets.maximintegrated.com/en/ds/MAX30102.pdf?src-supplier=Digi-Key, Manufacturer Part Number=MAX30102EFD+T, Output Type=I2C, Pricing 1="1=9.76, 10=8.815, 25=8.61 (USD)", RoHS Compliant=Yes, Stock 1=4064, Supplier 1=Digi-Key
U8: library part "IC LDLN025J18R REG LIN 1.8V 250MA 4FLIPCHIP", "Linear Voltage Regulator IC  1 Output  250mA 4-FlipChip", Dropout Voltage=250mV, Manufacturer=STMicroelectronics, Max Operating Temperature=125°C, Min Operating Temperature=-40°C, Output Current=250mA, Output Voltage=1.8V, Supplier Part Number 1=497-16899-1-ND, ComponentLink1Description=http://www.st.com/content/ccc/resource/sales_and_marketing/promotional_material/brochure/group0/cb/7a/af/56/f7/bd/47/e9/Brochure%20Power%20management%20guide/files/Brochure_Power_Management.pdf/jcr:content/translations/en.Brochure_Power_Management.pdf?src-supplier=Digi-Key, ComponentLink1URL=http://www.st.com/content/ccc/resource/sales_and_marketing/promotional_material/brochure/group0/cb/7a/af/56/f7/bd/47/e9/Brochure%20Power%20management%20guide/files/Brochure_Power_Management.pdf/jcr:content/translations/en.Brochure_Power_Management.pdf?src-supplier=Digi-Key, Manufacturer Part Number=LDLN025J18R, Number of Regulators=1, Pricing 1="1=0.65, 10=0.556, 25=0.5192, 100=0.3858, 250=0.3265, 500=0.3116, 1000=0.23 (USD)", RoHS Compliant=Yes, Stock 1=4800, Supplier 1=Digi-Key
U9: library part "IC TXS0102 TRNSLTR BIDIRECTIONAL 8X2SON", "2-Bit Bidirectional Voltage-Level Translator for Open-Drain Application", High Level Output Current=-20uA, Low Level Output Current=1mA, Manufacturer="Texas Instruments", Max Operating Temperature=85°C, Max Supply Voltage=5.5V, Min Operating Temperature=-40°C, Min Supply Voltage=1.65V, Package Quantity=1, Quiescent Current=14.4uA, Supplier Part Number 1=296-28435-1-ND, ComponentLink1Description=https://www.verical.com/server-webapp/html/getDatasheet?partID=544149&src-supplier=Verical, ComponentLink1URL=https://www.verical.com/server-webapp/html/getDatasheet?partID=544149&src-supplier=Verical, ComponentLink2Description=http://www.ti.com/general/docs/suppproductinfo.tsp?distId=10&gotoUrl=http%3A%2F%2Fwww.ti.com%2Flit%2Fgpn%2Ftxs0102&src-supplier=Digi-Key, ComponentLink2URL=http://www.ti.com/general/docs/suppproductinfo.tsp?distId=10&gotoUrl=http%3A%2F%2Fwww.ti.com%2Flit%2Fgpn%2Ftxs0102&src-supplier=Digi-Key, Contact Plating=Gold, Data Rate=24Mbps, Height=0.35mm, Lead Free="Lead Free", Length=1.85mm, Logic Function=Translator, Manufacturer Part Number=TXS0102DQMR, Mount="Surface Mount", Number of Bits=2, Number of Channels=2, Number of Inputs=2, Number of Pins=8, Output Type=Voltage, Packaging="Tape and Reel", Pricing 1="1=0.69, 10=0.611, 25=0.5736, 100=0.4681, 250=0.4348, 500=0.37, 1000=0.296 (USD)", Propagation Delay=260ns, Radiation Hardening=No, REACH SVHC="No SVHC", Stock 1=53273, Supplier 1=Digi-Key, Turn-On Delay Time=4.6ns, Width=1.25mm
U10: library part "IC TPS22930AYZVT PWR SWITCH P-CHAN 1:1 4DSBGA", "Power Switch/Driver 1:1 P-Channel 2A 4-DSBGA (0.88x0.88)", Current=-200mA, Manufacturer="Texas Instruments", Max Operating Temperature=85°C, Max Supply Voltage=5.5V, Min Operating Temperature=-40°C, On-State Resistance=35mR, Output Current=2A, Package Quantity=1, Quiescent Current=2.1uA, Supplier Part Number 1=296-35609-1-ND, ComponentLink1Description=http://www.ti.com/lit/ds/symlink/tps22930a.pdf?src-supplier=Digi-Key, ComponentLink1URL=http://www.ti.com/lit/ds/symlink/tps22930a.pdf?src-supplier=Digi-Key, ComponentLink2Description=http://www.ti.com/general/docs/lit/getliterature.tsp?genericPartNumber=TPS22930A&&fileType=pdf&src-supplier=Avnet, ComponentLink2URL=http://www.ti.com/general/docs/lit/getliterature.tsp?genericPartNumber=TPS22930A&&fileType=pdf&src-supplier=Avnet, ComponentLink3Description=https://www.verical.com/server-webapp/html/getDatasheet?partID=700707&src-supplier=Verical, ComponentLink3URL=https://www.verical.com/server-webapp/html/getDatasheet?partID=700707&src-supplier=Verical, Height=0.3mm, Lead Free="Lead Free", Length=0.92mm, Manufacturer Part Number=TPS22930AYZVT, Mount="Surface Mount", Number of Channels=1, Number of Outputs=1, Number of Pins=4, Packaging="Tape and Reel", Pricing 1="1=0.77, 10=0.675, 25=0.634, 100=0.4808 (USD)", Radiation Hardening=No, REACH SVHC="No SVHC", RoHS Compliant=Yes, Series=-, Stock 1=260, Supplier 1=Digi-Key, Turn-Off Delay Time=9.5us, Turn-On Delay Time=7.4us, Type="General Purpose", Voltage=5.5V, Width=0.918mm
U11: library part "IC BMP388 SENSOR PRESSURE ABS", "Pressure Sensor 4.35PSI ~ 18.13PSI (30kPa ~ 125kPa) Absolute   10-WFLGA", Capacitance=4.7uF, Case Code (Imperial)=0805, Case Code (Metric)=2012, Case/Package=LGA, Continuous Drain Current (ID)=4A, Drain to Source Voltage (Vdss)=30V, Input Capacitance=645pF, Manufacturer="Bosch Sensortec", Max Operating Temperature=150°C, Max Power Dissipation=1.4W, Min Operating Temperature=-55°C, Operating Pressure=18.13PSI, Ratings=AEC-Q200, Supplier Part Number 1=828-1079-1-ND, Tolerance=20%, Voltage Rating=16V, ComponentLink1Description=https://ae-bst.resource.bosch.com/media/_tech/media/datasheets/BST-BMP388-DS001.pdf?src-supplier=Digi-Key, ComponentLink1URL=https://ae-bst.resource.bosch.com/media/_tech/media/datasheets/BST-BMP388-DS001.pdf?src-supplier=Digi-Key, ComponentLink2Description=https://ae-bst.resource.bosch.com/media/_tech/media/product_flyer/BST-BMP388-FL000-00.pdf?src-supplier=Digi-Key, ComponentLink2URL=https://ae-bst.resource.bosch.com/media/_tech/media/product_flyer/BST-BMP388-FL000-00.pdf?src-supplier=Digi-Key, ComponentLink3Description=https://ae-bst.resource.bosch.com/media/_tech/media/application_notes/BST-BMP380-HS000.pdf?src-supplier=Digi-Key, ComponentLink3URL=https://ae-bst.resource.bosch.com/media/_tech/media/application_notes/BST-BMP380-HS000.pdf?src-supplier=Digi-Key, Features="Soft Termination", Manufacturer Part Number=BMP388, Mount="Surface Mount", Number of Pins=10, Output Type=SPI,I2C, Packaging="Tape and Reel", Port Style="No Port", Pressure Type=Absolute, Pricing 1="1=3.81, 5=3.366, 10=2.973, 25=2.4124, 50=2.1318, 100=2.0757, 500=1.7391, 1000=1.6269, 5000=1.5147 (USD)", Rds On Max=50mR, Stock 1=30816, Supplier 1=Digi-Key, Termination=SMD/SMT
U12: library part "CMC 200MA 2LN SMD ESD", "2 Line Common Mode Choke Surface Mount  200mA DCR 2.5Ohm", Case/Package=QFN, Current=200mA, DC Resistance (DCR)=2.5R, Manufacturer=STMicroelectronics, Max Operating Temperature=85°C, Min Operating Temperature=-40°C, Package Quantity=1, Supplier Part Number 1=497-10773-1-ND, ComponentLink1Description=http://www.st.com/web/en/resource/technical/document/datasheet/CD00282307.pdf?src-supplier=Future+Electronics, ComponentLink1URL=http://www.st.com/web/en/resource/technical/document/datasheet/CD00282307.pdf?src-supplier=Future+Electronics, ComponentLink2Description=http://www.st.com/content/ccc/resource/technical/document/datasheet/3a/28/cf/d0/31/63/48/8c/CD00282307.pdf/files/CD00282307.pdf/jcr:content/translations/en.CD00282307.pdf?src-supplier=Digi-Key, ComponentLink2URL=http://www.st.com/content/ccc/resource/technical/document/datasheet/3a/28/cf/d0/31/63/48/8c/CD00282307.pdf/files/CD00282307.pdf/jcr:content/translations/en.CD00282307.pdf?src-supplier=Digi-Key, ComponentLink3Description=http://www.mouser.com/ds/2/389/ecmf02-2amx6-954491.pdf?src-supplier=Mouser, ComponentLink3URL=http://www.mouser.com/ds/2/389/ecmf02-2amx6-954491.pdf?src-supplier=Mouser, ComponentLink4Description=https://www.verical.com/server-webapp/html/getDatasheet?partID=259862&src-supplier=Verical, ComponentLink4URL=https://www.verical.com/server-webapp/html/getDatasheet?partID=259862&src-supplier=Verical, Current Rating=200mA, Depth=1.55mm, Height=0.022inch, Lead Free="Lead Free", Length=1.75mm, Manufacturer Part Number=ECMF02-2AMX6, Max Current Rating=200mA, Mount="Surface Mount", Number of Lines=2, Number of Pins=6, Packaging="Tape and Reel", Pricing 1="1=0.48, 10=0.418, 25=0.3888, 50=0.3288, 100=0.2989, 250=0.281, 500=0.2511, 1000=0.2033 (USD)", Radiation Hardening=No, REACH SVHC="No SVHC", Stock 1=23653, Supplier 1=Digi-Key, Termination=Flat, Width=0.059inch
U13: library part "TVS DIODE PP U-DFN3810-9", "5V (Typ) Clamp 5A (8/20µs) Ipp Tvs Diode Surface Mount U-DFN3810-9", Manufacturer=Diodes, Supplier Part Number 1=D3V3F8U9LP3810-7DICT-ND, Manufacturer Part Number=D3V3F8U9LP3810-7, Pricing 1="1=0.42, 10=0.317, 100=0.1508, 500=0.1336, 1000=0.104 (USD)", Stock 1=14880, Supplier 1=Digi-Key
U14: library part "IC BQ25157YFPR BATT CHG LI-ION 1CELL 20DSBGA", "Charger IC Lithium Ion/Polymer 20-DSBGA (2.02x1.62)", Manufacturer="Texas Instruments", Supplier Part Number 1=296-BQ25157YFPRCT-ND, ComponentLink1Description=https://octopart.com/click/track?ai=10049&ct=datasheets&sig=0484d06&at=physicalpart&sid=370&ppid=114161831&hlid=31393893&src-supplier=TI+store, ComponentLink1URL=https://octopart.com/click/track?ai=10049&ct=datasheets&sig=0484d06&at=physicalpart&sid=370&ppid=114161831&hlid=31393893&src-supplier=TI+store, Manufacturer Part Number=BQ25157YFPR, Pricing 1="1=2.97, 10=2.664, 25=2.5184, 100=2.0708, 250=1.8581, 500=1.791, 1000=1.4888 (USD)", Stock 1=0, Supplier 1=Digi-Key
U16: library part "IC TPS61169 WLED BACKLIGHT DRIVER SC70-5", "LED Driver IC 1 Output DC DC Regulator Step-Up (Boost) PWM Dimming 1.8A (Switch) SC-70-5", Case/Package=SC, Frequency=1.2MHz, Manufacturer="Texas Instruments", Max Input Voltage=5.5V, Max Operating Temperature=85°C, Max Output Current=2.4A, Max Output Voltage=38V, Min Input Voltage=2.7V, Min Operating Temperature=-40°C, Nominal Input Voltage (DC)=3.6V, Output Current=400mA, Output Current per Channel=1.8A, Package Quantity=3000, Supplier Part Number 1=296-40821-1-ND, ComponentLink1Description=http://www.ti.com/general/docs/lit/getliterature.tsp?genericPartNumber=TPS61169&&fileType=pdf&src-supplier=Element14, ComponentLink1URL=http://www.ti.com/general/docs/lit/getliterature.tsp?genericPartNumber=TPS61169&&fileType=pdf&src-supplier=Element14, ComponentLink2Description=http://www.ti.com/general/docs/lit/getliterature.tsp?genericPartNumber=TPS61169&amp;&amp;fileType=pdf&src-supplier=Farnell, ComponentLink2URL=http://www.ti.com/general/docs/lit/getliterature.tsp?genericPartNumber=TPS61169&amp;&amp;fileType=pdf&src-supplier=Farnell, ComponentLink3Description=http://www.ti.com/lit/ds/symlink/tps61169.pdf?src-supplier=Digi-Key, ComponentLink3URL=http://www.ti.com/lit/ds/symlink/tps61169.pdf?src-supplier=Digi-Key, ComponentLink4Description=http://www.ti.com/general/docs/lit/getliterature.tsp?genericPartNumber=TPS61169&&fileType=pdf&src-supplier=Avnet, ComponentLink4URL=http://www.ti.com/general/docs/lit/getliterature.tsp?genericPartNumber=TPS61169&&fileType=pdf&src-supplier=Avnet, ComponentLink5Description=http://www.ti.com/lit/gpn/tps61169?src-supplier=Mouser, ComponentLink5URL=http://www.ti.com/lit/gpn/tps61169?src-supplier=Mouser, Contact Plating=Gold, Dimming=PWM, Height=1.1mm, Lead Free="Lead Free", Length=2mm, Manufacturer Part Number=TPS61169DCKR, Max Input Voltage (DC)=5.5V, Max Supply Voltage=5.5V, Min Output Voltage=2.7V, Mount="Surface Mount", Number of Channels=1, Number of Outputs=1, Number of Pins=5, Output Type=Frequency, Output Voltage=38V, Packaging="Tape and Reel", Pricing 1="1=0.9, 10=0.805, 25=0.7644, 100=0.587, 250=0.5187, 500=0.4914, 1000=0.3822 (USD)", REACH SVHC="No SVHC", Stock 1=112915, Supplier 1=Digi-Key, Switching Frequency=1.2MHz, Topology=Boost, Weight=0.000705oz, Width=1.25mm
U17: library part "IC PCA9632TK,118 LED DRVR LIN DIM 25MA 8HVSON", "LED Driver IC 4 Output Power Switch  PWM Dimming 25mA 8-HVSON (3x3)", Frequency=400kHz, Low Level Output Current=100mA, Manufacturer="NXP Semiconductors", Max Operating Temperature=85°C, Max Power Dissipation=400mW, Max Supply Current=108uA, Max Supply Voltage=5.5V, Min Operating Temperature=-40°C, Min Supply Voltage=2.3V, Nominal Supply Current=150uA, Package Quantity=1, Supplier Part Number 1=568-8715-1-ND, 7B-I2C_ADDR="0b1100010 (0x62)", ComponentLink1Description=http://www.nxp.com/documents/data_sheet/PCA9632.pdf?src-supplier=Digi-Key, ComponentLink1URL=http://www.nxp.com/documents/data_sheet/PCA9632.pdf?src-supplier=Digi-Key, ComponentLink2Description=https://www.nxp.com/docs/en/brochure/75016950.pdf?src-supplier=Digi-Key, ComponentLink2URL=https://www.nxp.com/docs/en/brochure/75016950.pdf?src-supplier=Digi-Key, ComponentLink3Description=http://www.classic.nxp.com/documents/data_sheet/PCA9632.pdf?src-supplier=Avnet+Europe, ComponentLink3URL=http://www.classic.nxp.com/documents/data_sheet/PCA9632.pdf?src-supplier=Avnet+Europe, Contact Plating=Gold, Lead Free="Lead Free", Manufacturer Part Number=PCA9632TK,118, Mount="Surface Mount", Number of Outputs=4, Number of Pins=8, Number of Segments=4, Output Voltage=5.5V, Packaging="Tape and Reel", Power Dissipation=400mW, Pricing 1="1=1.33, 10=1.192, 25=1.1312, 100=0.8686, 250=0.7676, 500=0.7272, 1000=0.5656, 2500=0.5373 (USD)", Radiation Hardening=No, Stock 1=2394, Supplier 1=Digi-Key
U18: library part "IC MT29F1G01ABAFDWB FLASH 1GBIT SPI 8UPDFN", "FLASH - NAND Memory IC 1Gb (1G x 1) SPI   8-U-PDFN (8x6)", Manufacturer="Micron Technology", Max Operating Temperature=85°C, Min Operating Temperature=-40°C, Supplier Part Number 1=557-1654-1-ND, Interface=SPI,Serial, Manufacturer Part Number="MT29F1G01ABAFDWB-IT:F TR", Memory Type=FLASH,NAND, Number of Pins=8, Packaging="Tape and Reel", Pricing 1="1=2.68, 10=2.414, 25=2.3768, 50=2.3704, 100=2.1181, 250=2.0485, 500=2.041, 1000=1.9006 (USD)", Stock 1=2188, Supplier 1=Digi-Key
U20: "Accelerometer, Gyroscope, 6 Axis Sensor IÂ²C, SPI Output", Package="LGA-14 Bosch Sensortec", Availability=Unavailable, MF="Bosch Sensortec", MP=BMI270, Price=None, SnapEDA_Link=https://www.snapeda.com/parts/BMI270/Bosch%20Sensortec/view-part/3595167/?ref=snap
U21: library part nRF52840-QIAAD0, "Multi-protocol Bluetooth Low Energy, IEEE 802.15.4, ANT and 2.4GHz proprietary system-on-chip", Manufacturer="Nordic Semiconductor", Part number IPS=N.A., Artikkelnr Noca=N.A., ComponentLink1Description=Datasheet, ComponentLink2Description="Supplier link", Footprint Doc=AQFN-73, LatestRevisionDate=2018-12-04, Manufacturer Part Number=nRF52840-QIAAD0, Part Number=nRF52840-QIAAD0, Pin Count=73, Published=2018-12-04, Publisher="Nordic Semiconductor", Supplier 1="Nordic Semiconductor", Supplier Part Number 1=nRF52840-QIAAD0
X1: library part "CONN HEADER TH R/A 3POS 1.5MM", "Connector Header Through Hole, Right Angle 3 position 0.059\" (1.50mm)", Color=Natural,White, Contact Resistance=30mR, Current Rating=1A, Flammability Rating="UL94 V-0", Housing Color=Beige, Insulation Resistance=500MR, Manufacturer=JST, Manufacturer Part Number=S3B-ZR(LF)(SN), Max Operating Temperature=85°C, Max Voltage Rating (AC)=50V, Min Operating Temperature=-25°C, Supplier Part Number 1=455-1670-ND, Body Plating=Tin, ComponentLink1Description=http://www.jst-mfg.com/product/pdf/eng/eZH.pdf?src-supplier=Digi-Key, ComponentLink1URL=http://www.jst-mfg.com/product/pdf/eng/eZH.pdf?src-supplier=Digi-Key, ComponentLink2Description=https://www.verical.com/server-webapp/html/getDatasheet?partID=722697&src-supplier=Verical, ComponentLink2URL=https://www.verical.com/server-webapp/html/getDatasheet?partID=722697&src-supplier=Verical, ComponentLink3Description=http://www.produktinfo.conrad.com/datenblaetter/725000-749999/741155-da-01-en-STIFTLEISTE_GEWINKELT_3_POL_RM1_5.pdf?src-supplier=Conrad, ComponentLink3URL=http://www.produktinfo.conrad.com/datenblaetter/725000-749999/741155-da-01-en-STIFTLEISTE_GEWINKELT_3_POL_RM1_5.pdf?src-supplier=Conrad, Connector Type="Male Pin", Contact Material=Brass,Copper,Tin, Contact Mating Length=0.094inch, Contact Plating=Tin,Copper, Depth=6mm, Fastening Type=Detent, Gender=Male, Height=7.2mm, Housing Material=Polyamide, Lead Free="Lead Free", Lead Pitch=1.5mm, Length=6mm, Material=Nylon, Max Current Rating=1A, Mount="Through Hole", Number of Contacts=3, Number of Pins=3, Number of Positions=3, Number of Rows=1, Orientation="Right Angle", Packaging=Bulk, Panel Thickness=3.5mm, pin_1=BATT+, pin_2=TS, pin_3=BATT-, Pitch=1.5mm, Pricing 1="1=0.2, 10=0.184, 100=0.1274, 500=0.1078, 1000=0.0882, 5000=0.0784, 10000=0.071 (USD)", REACH SVHC="No SVHC", Stock 1=0, Supplier 1=Digi-Key, Termination=Press-Fit, Voltage Rating=50V, Voltage Rating (AC)=50V, Voltage Rating (DC)=50V, Width=3.5mm